# EAGLE board driver ckt_4_bjtThroHole (EAGLE 8.4.3)
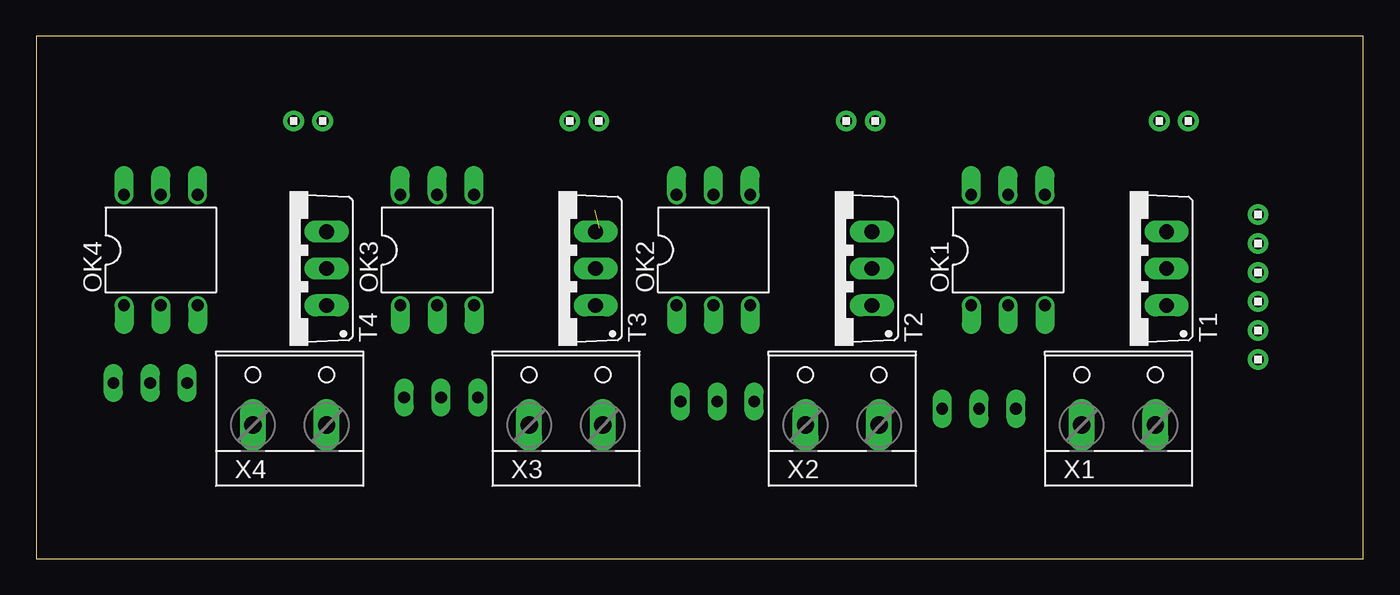
[diagram p0: board, top side]
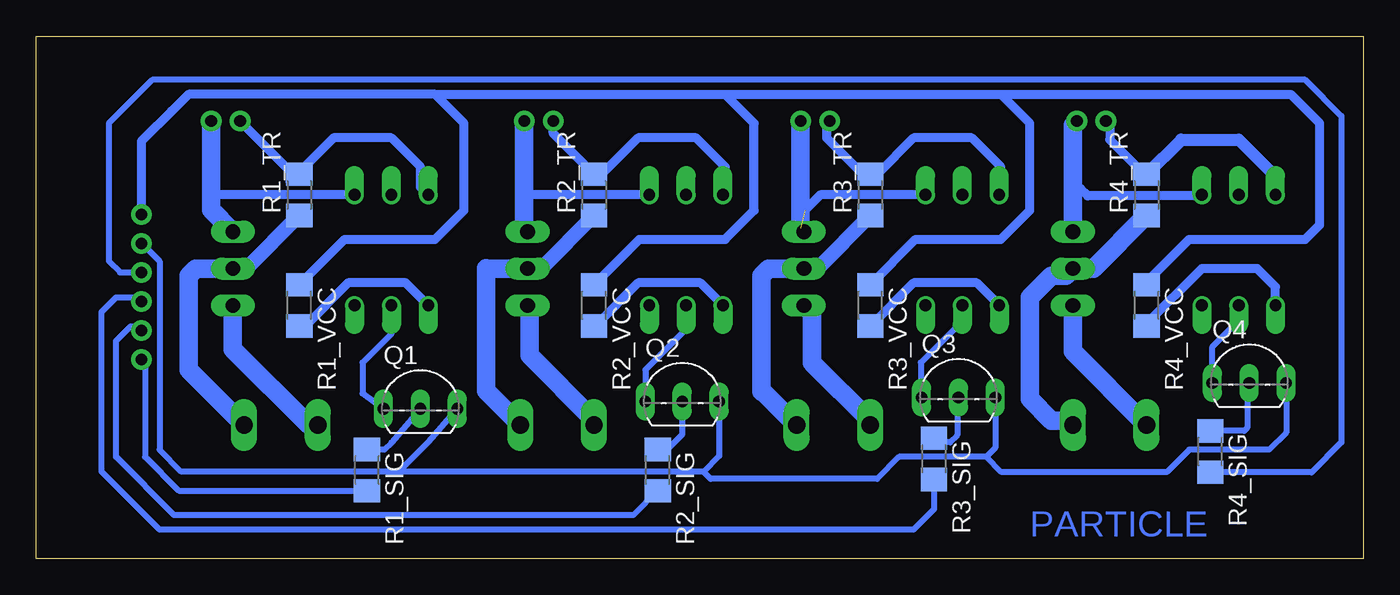
[diagram p1: board, bottom side, seen from below]

Size 91.5 x 36 mm. Coordinates in mm from the lower left corner, seen from the top.
Outline: 0,0 91.5,0 91.5,36 0,36 0,0
Copper layers (1*16): Top 0.035mm / dielectric 1.5mm / Bottom 0.035mm
Design rules "default": minimum track width 6mil, minimum drill 0.35mm, track to track 6mil, track to pad 6mil, pad to pad 6mil, via to via 6mil, smd to smd 6mil, copper to edge 40mil, drill to drill 6mil, minimum pad ring 10mil, minimum via ring 8mil, stop-mask expansion 4mil, vias tented up to drill 0mil, thermal gap 10mil

## Footprints (pad centres in the part's own frame; a part is rotated, then mirrored left to right if it is on the bottom)
1X2 = drill 0.8 pad 1.422: 1 -1,0; 2 1,0
DIL06 = drill 0.813 offset: 1 -2.54,-3.81; 2 0,-3.81; 3 2.54,-3.81; 4 2.54,3.81; 5 0,3.81; 6 -2.54,3.81
TO92-EBC = drill 0.813 long: B 0,-1.27; C -2.54,-1.27; E 2.54,-1.27
R1206 = smd 1.6 x 1.803: 1 -1.422,0; 2 1.422,0
TO220BV = drill 1.016 long: G 2.54,-2.54; T1 -2.54,-2.54; T2 0,-2.54
1X6 = drill 0.8 pad 1.422: 1 -5,0; 2 -3,0; 3 -1,0; 4 1,0; 5 3,0; 6 5,0
W237-132 = drill 1.194 long: 1 -2.54,-0.635; 2 2.54,-0.635

## Placement (x,y rotation side)
JP1  1X2  [1X2]  78.44,30.15 0 top
JP2  1X2  [1X2]  56.85,30.15 0 top
JP3  1X2  [1X2]  37.8,30.15 0 top
JP4  1X2  [1X2]  18.75,30.15 0 top
OK1  MOC3021M  [DIL06]  67.01,21.26 0 top
OK2  MOC3021M  [DIL06]  46.69,21.26 0 top
OK3  MOC3021M  [DIL06]  27.64,21.26 0 top
OK4  MOC3021M  [DIL06]  8.59,21.26 0 top
Q1  BC548  [TO92-EBC]  65.01,11.6 0 bottom
Q2  BC548  [TO92-EBC]  46.96,12.1 0 bottom
Q3  BC548  [TO92-EBC]  27.91,12.37 0 bottom
Q4  BC548  [TO92-EBC]  7.86,13.37 0 bottom
R1_SIG  [R1206]  68.7,6.1 270 bottom
R1_TR  [R1206]  73.36,25.07 90 bottom
R1_VCC  [R1206]  73.36,17.45 270 bottom
R2_SIG  [R1206]  48.65,6.1 270 bottom
R2_TR  [R1206]  53.04,25.07 90 bottom
R2_VCC  [R1206]  53.04,17.45 270 bottom
R3_SIG  [R1206]  29.6,6.87 270 bottom
R3_TR  [R1206]  33.99,25.07 90 bottom
R3_VCC  [R1206]  33.99,17.45 270 bottom
R4_SIG  [R1206]  10.55,7.37 270 bottom
R4_TR  [R1206]  14.94,25.07 90 bottom
R4_VCC  [R1206]  14.94,17.45 270 bottom
T1  BT138-V  [TO220BV]  75.4,19.99 90 top
T2  BT138-V  [TO220BV]  55.08,19.99 90 top
T3  BT138-V  [TO220BV]  36.03,19.99 90 top
T4  BT138-V  [TO220BV]  17.48,19.99 90 top
U$1  1X6  [1X6]  84.25,18.72 270 top
X1  [W237-132]  74.63,9.83 0 top
X2  [W237-132]  55.58,9.83 0 top
X3  [W237-132]  36.53,9.83 0 top
X4  [W237-132]  17.48,9.83 0 top

## Library data of the parts
JP1-JP4 U$1 = headers(2mm)
OK1-OK4 = optocoupler; MF: FAIRCHILD SEMICONDUCTOR; MPN: MOC3021-M; OC_FARNELL: 1021365; OC_NEWARK: 95B7895
Q1-Q4 = transistor-npn
R1_SIG R1_TR R1_VCC R2_SIG R2_TR R2_VCC R3_SIG R3_TR R3_VCC R4_SIG R4_TR R4_VCC = eagle-ltspice; SPICEMODEL: NONE; SPICEPREFIX: R
T1-T4 = triac
X1-X4 = con-wago-508; OC_FARNELL: unknown; OC_NEWARK: unknown

## Nets
+5V: R1_VCC.1 R2_VCC.1 R3_VCC.1 R4_VCC.1 U$1.1
IN1: R1_SIG.2 U$1.6
IN2: R2_SIG.2 U$1.5
IN3: R3_SIG.2 U$1.4
IN4: R4_SIG.2 U$1.3
N$1: JP1.1 OK1.6 R1_TR.2
N$2: R1_TR.1 T1.T2 X1.2
N$3: T1.T1 X1.1
N$4: OK1.1 R1_VCC.2
N$5: OK1.2 Q1.C
N$6: JP2.2 OK2.4 T2.G
N$7: JP1.2 OK1.4 T1.G
N$8: JP2.1 OK2.6 R2_TR.2
N$9: Q1.B R1_SIG.1
N$10: R2_TR.1 T2.T2 X2.2
N$11: Q2.B R2_SIG.1
N$12: T2.T1 X2.1
N$13: OK2.1 R2_VCC.2
N$14: OK2.2 Q2.C
N$15: JP3.2 OK3.4 T3.G
N$16: JP3.1 OK3.6 R3_TR.2
N$17: R3_TR.1 T3.T2 X3.2
N$18: Q3.B R3_SIG.1
N$19: T3.T1 X3.1
N$20: OK3.1 R3_VCC.2
N$21: OK3.2 Q3.C
N$22: JP4.2 OK4.4 T4.G
N$23: JP4.1 OK4.6 R4_TR.2
N$24: R4_TR.1 T4.T2 X4.2
N$25: Q4.B R4_SIG.1
N$26: T4.T1 X4.1
N$27: OK4.1 R4_VCC.2
N$28: OK4.2 Q4.C
PE: Q1.E Q2.E Q3.E Q4.E U$1.2

## Tracks (layer width: path | path; a pad name or v marks a point on that pad's centre or on a via)
+5V
  Bottom 0.61: R4_VCC.1 14.94,19.06 12,22 4,22 3,23 3,30 5,32 25,32 | 44,32 25,32 | 64,32 44,32 | 64,32 81,32 82,31 | 82,31 82.25,30.75 | R3_VCC.1 30.86,22 25,22 23,24 23,30 25,32 | R2_VCC.1 49.91,22 44,22 42,24 42,30 44,32 | R1_VCC.1 70.23,22 64,22 62,24 62,30 64,32 | 82,31 84.25,28.75 U$1.1
IN1
  Bottom 0.406: U$1.6 84,13.47 84,7 81.68,4.68 R1_SIG.2
IN2
  Bottom 0.406: R2_SIG.2 50.33,3 82,3 86,7 86,15 85,16 84.53,16 U$1.5
IN3
  Bottom 0.406: R3_SIG.2 29.6,3.4 31,2 83,2 87,6 87,17 86,18 84.53,18 U$1.4
IN4
  Bottom 0.406: U$1.3 85.72,19.72 86.5,20.5 86.5,30 83.5,33 4,33 1.5,30.5 1.5,8 3.55,5.95 R4_SIG.2
N$1
  Bottom 0.61: OK1.6 65,25.6 65,27 67,29 71,29 74,26 | 74,26 73.51,26.49 R1_TR.2 | JP1.1 74,26.71 74,26
N$2
  Bottom 1.016: R1_TR.1 77.02,19.99 T1.T2
  Bottom 1.27: T1.T2 80.51,19.99 81,19.5 81,13 80.97,13 X1.2
N$3
  Bottom 1.27: T1.T1 77.94,14.44 72.69,9.2 X1.1
N$4
  Bottom 0.61: OK1.1 66.02,19 70,19 72.97,16.03 R1_VCC.2
N$5
  Bottom 0.406: OK1.2 67.01,15.49 69,13.5 69,11.38 Q1.C
N$6
  Bottom 0.61: OK2.4 57.42,25.07 57.85,25.5
  Bottom 1.27: JP2.2 57.85,25.5 57.85,22.76 T2.G
N$7
  Bottom 0.61: OK1.4 79.01,25.07 79.44,25.5
  Bottom 1.27: JP1.2 79.44,25.5 79.44,24.03 T1.G
N$8
  Bottom 0.61: OK2.6 44,25.22 44,27 46,29 50,29 52.51,26.49 R2_TR.2 55.85,29.3 JP2.1
N$9
  Bottom 0.406: Q1.B 67.01,7.99 67.5,7.5 68.68,7.5 R1_SIG.1
N$10
  Bottom 1.016: R2_TR.1 56.7,19.99 T2.T2
  Bottom 1.27: T2.T2 60.49,19.99 60.5,20 60.5,11.58 X2.2
N$11
  Bottom 0.406: Q2.B 46.96,8.54 48,7.5 48.63,7.5 R2_SIG.1
N$12
  Bottom 1.27: T2.T1 57.5,17.33 57.5,14 53.04,9.54 X2.1
N$13
  Bottom 0.61: OK2.1 45.7,19 50,19 52.97,16.03 R2_VCC.2
N$14
  Bottom 0.406: OK2.2 46.69,15.81 49.5,13 Q2.C
N$15  (1 unrouted)
  Bottom 0.61: OK3.4 37.43,25.07 38.5,24 39,24
  Bottom 1.27: JP3.2 38.8,22.76 T3.G
N$16
  Bottom 0.61: OK3.6 25,25.17 25,27 27,29 31,29 33.51,26.49 R3_TR.2 34.49,26.49 37,29 37,29.95 JP3.1
N$17
  Bottom 1.016: R3_TR.1 37.65,19.99 T3.T2
  Bottom 1.27: T3.T2 41.01,19.99 41.5,19.5 41.5,11.5 41.38,11.5 X3.2
N$18
  Bottom 0.406: Q3.B 28,11.01 28,8.5 28.5,8 29.5,8 29.6,8.1 R3_SIG.1
N$19
  Bottom 1.27: T3.T1 38,16.88 38,13.5 33.99,9.49 X3.1
N$20
  Bottom 0.61: OK3.1 26.65,19 31,19 33.97,16.03 R3_VCC.2
N$21
  Bottom 0.406: OK3.2 27.64,16.36 30.5,13.5 30.5,11.15 Q3.C
N$22
  Bottom 0.61: OK4.4 11.2,25 19,25 19.5,25.5 20.02,25.5
  Bottom 1.27: JP4.2 20.02,29.88 20.02,25.5 T4.G
N$23
  Bottom 0.61: JP4.1 17.48,29.88 17.48,28.88 15.09,26.49 R4_TR.2
  Bottom 0.813: R4_TR.2 12.55,28.88 8.59,28.88 6.05,26.34 OK4.6
N$24
  Bottom 1.27: X4.2 20.33,9.5 21.5,9.5 23,11 23,18 21.5,19.5 20.51,19.5 T4.T2 18.6,19.99 R4_TR.1
N$25
  Bottom 0.406: Q4.B 8,11.96 8,9 8.21,8.79 R4_SIG.1
N$26
  Bottom 1.27: T4.T1 20.02,14.27 X4.1
N$27
  Bottom 0.61: OK4.1 6.05,18.72 7.32,19.99 11.13,19.99 14.94,16.18 R4_VCC.2
N$28
  Bottom 0.406: Q4.C 10.4,14.6 8.5,16.5 8.59,16.59 OK4.2
PE
  Bottom 0.406: Q4.E 5.32,8.68 6.5,7.5 12,7.5 13.5,6 25,6 26,7 | 45.5,6 44.42,7.08 Q2.E | 45.5,6 66.5,6 | 66.5,6 81.5,6 83,7.5 83,20.5 84.22,21.72 U$1.2 | Q1.E 64.47,8.03 66.5,6 | 45.5,6 45,5.5 33.5,5.5 32,7 26,7 | Q3.E 25.37,7.63 26,7

## Text on the board
Bottom: PARTICLE